# Altium PCB AFE1.PcbDoc
Units mil, origin at the board's own origin, x right, y up, seen from the top; angles counter-clockwise.
Board outline 3484.25 x 2370.08 mil, 2 copper layers (Top Layer, Bottom Layer), stack 49.8 mil thick; 165 components, 125 nets, 450 pads, 83 vias.
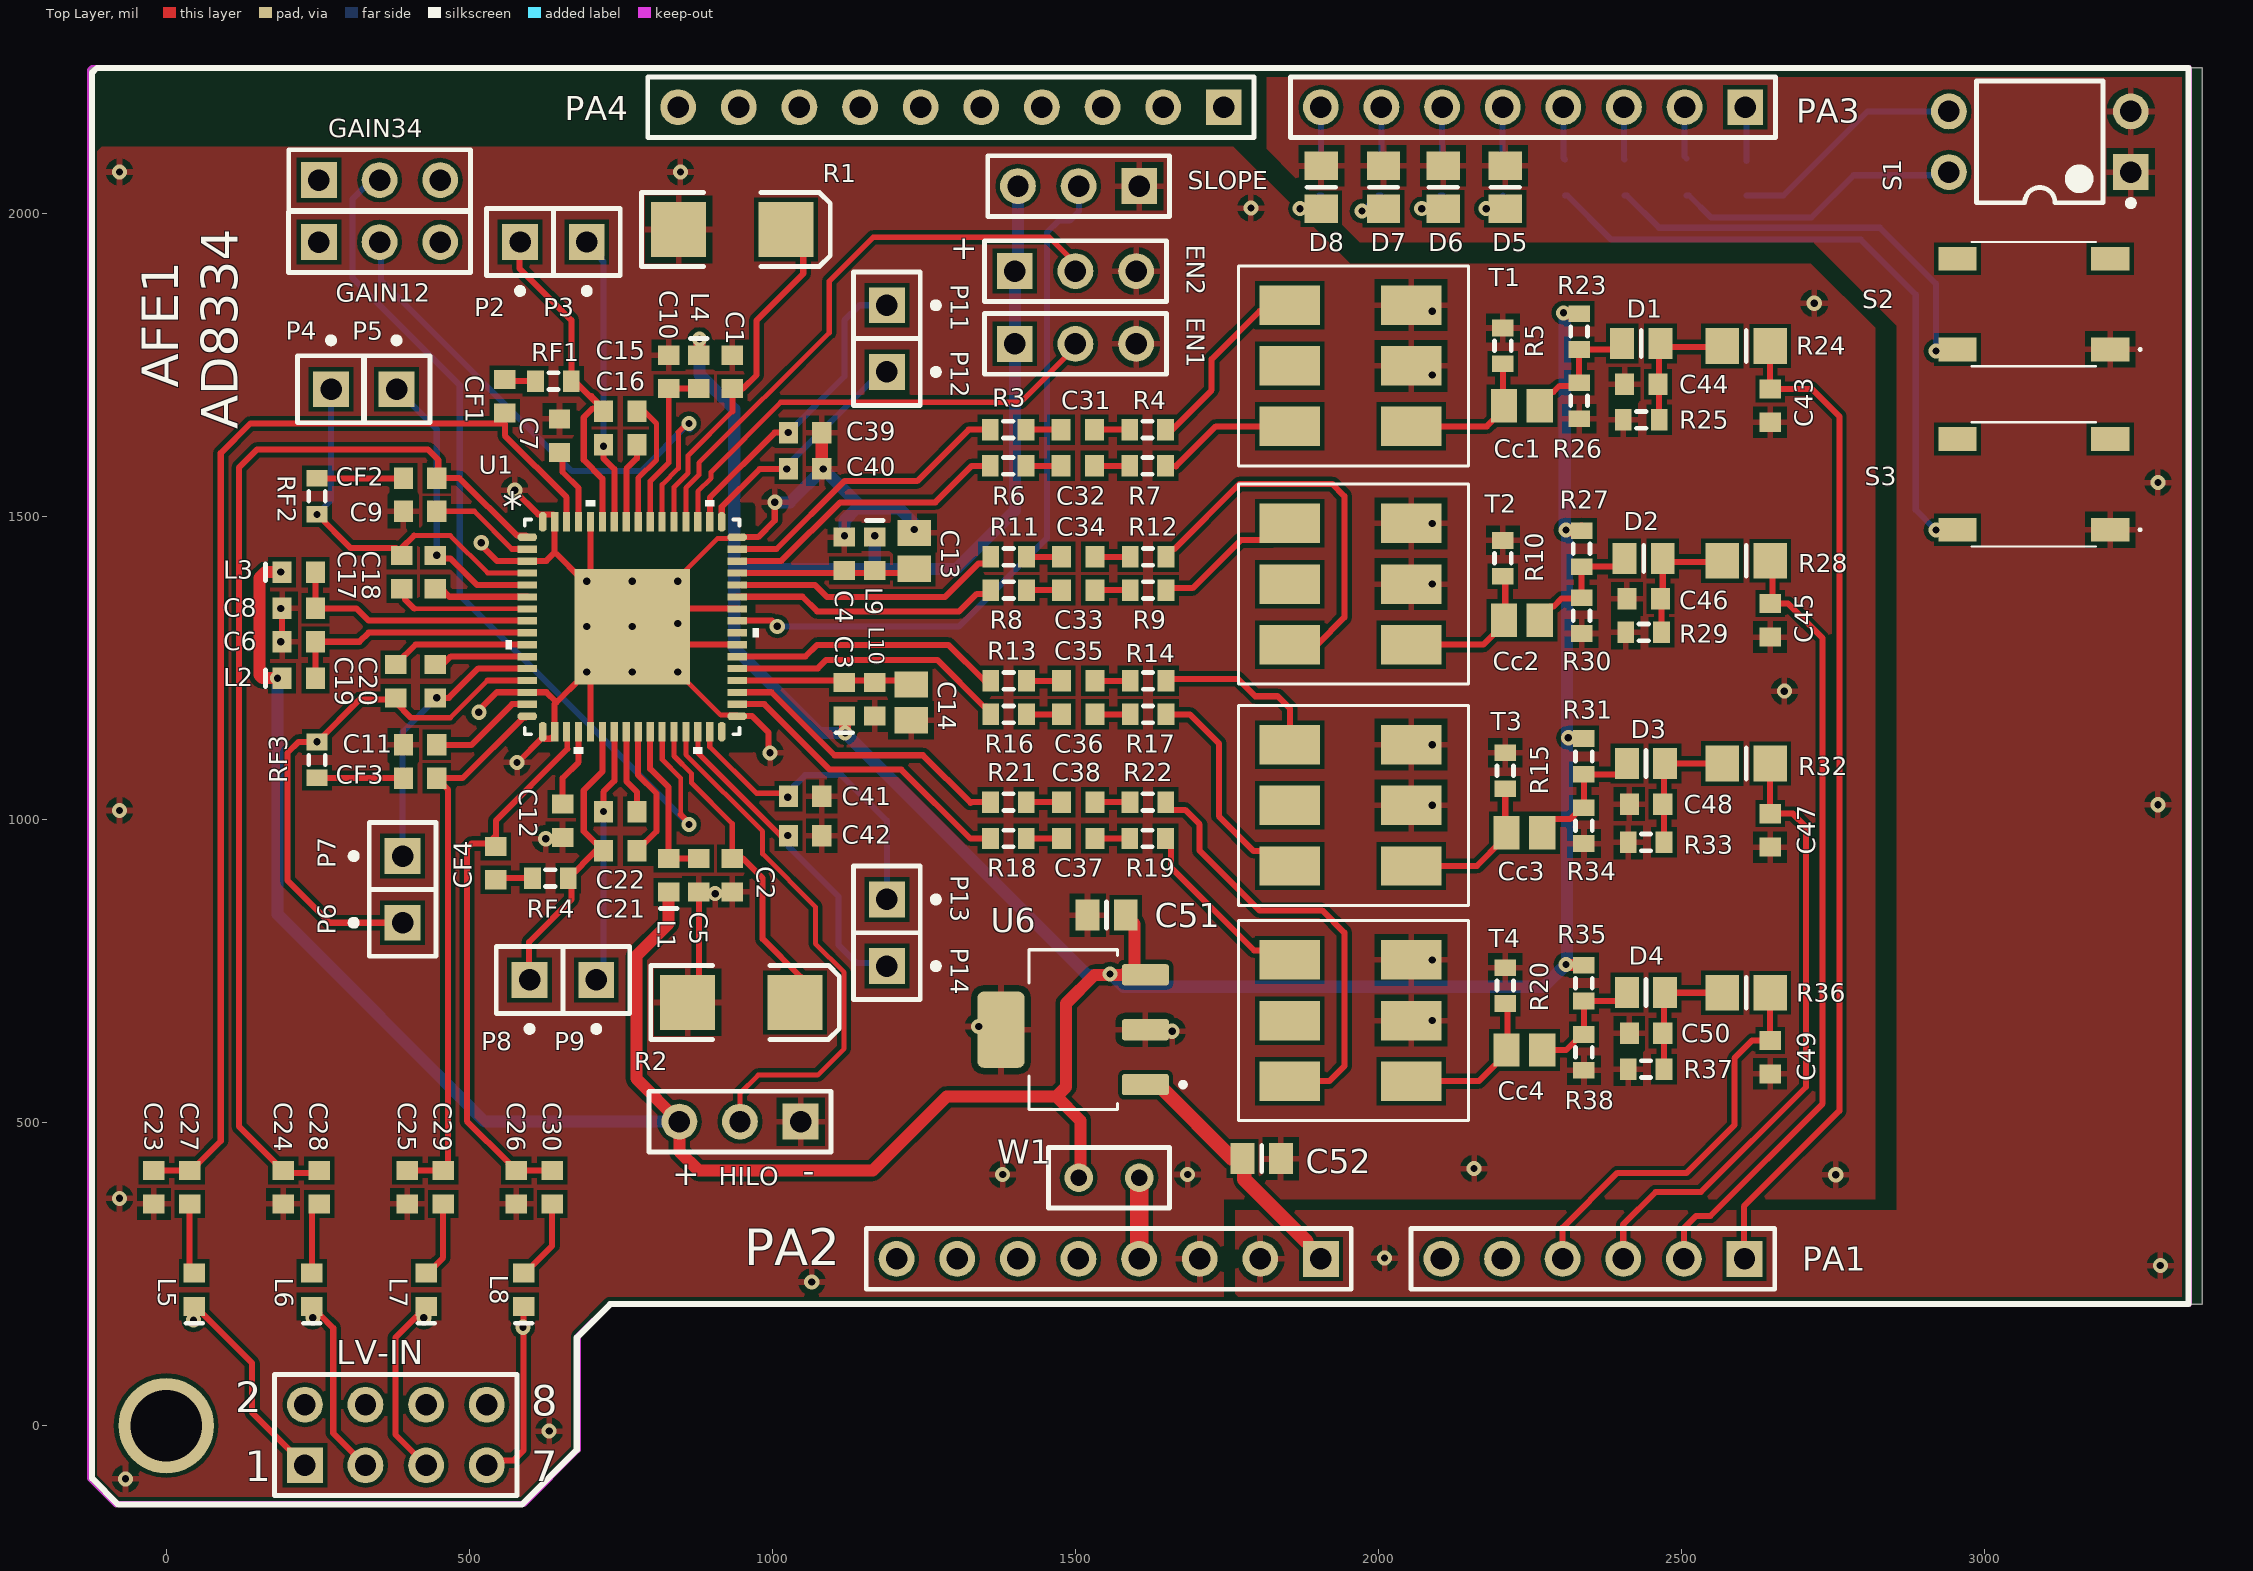
[diagram p0: Top Layer view]
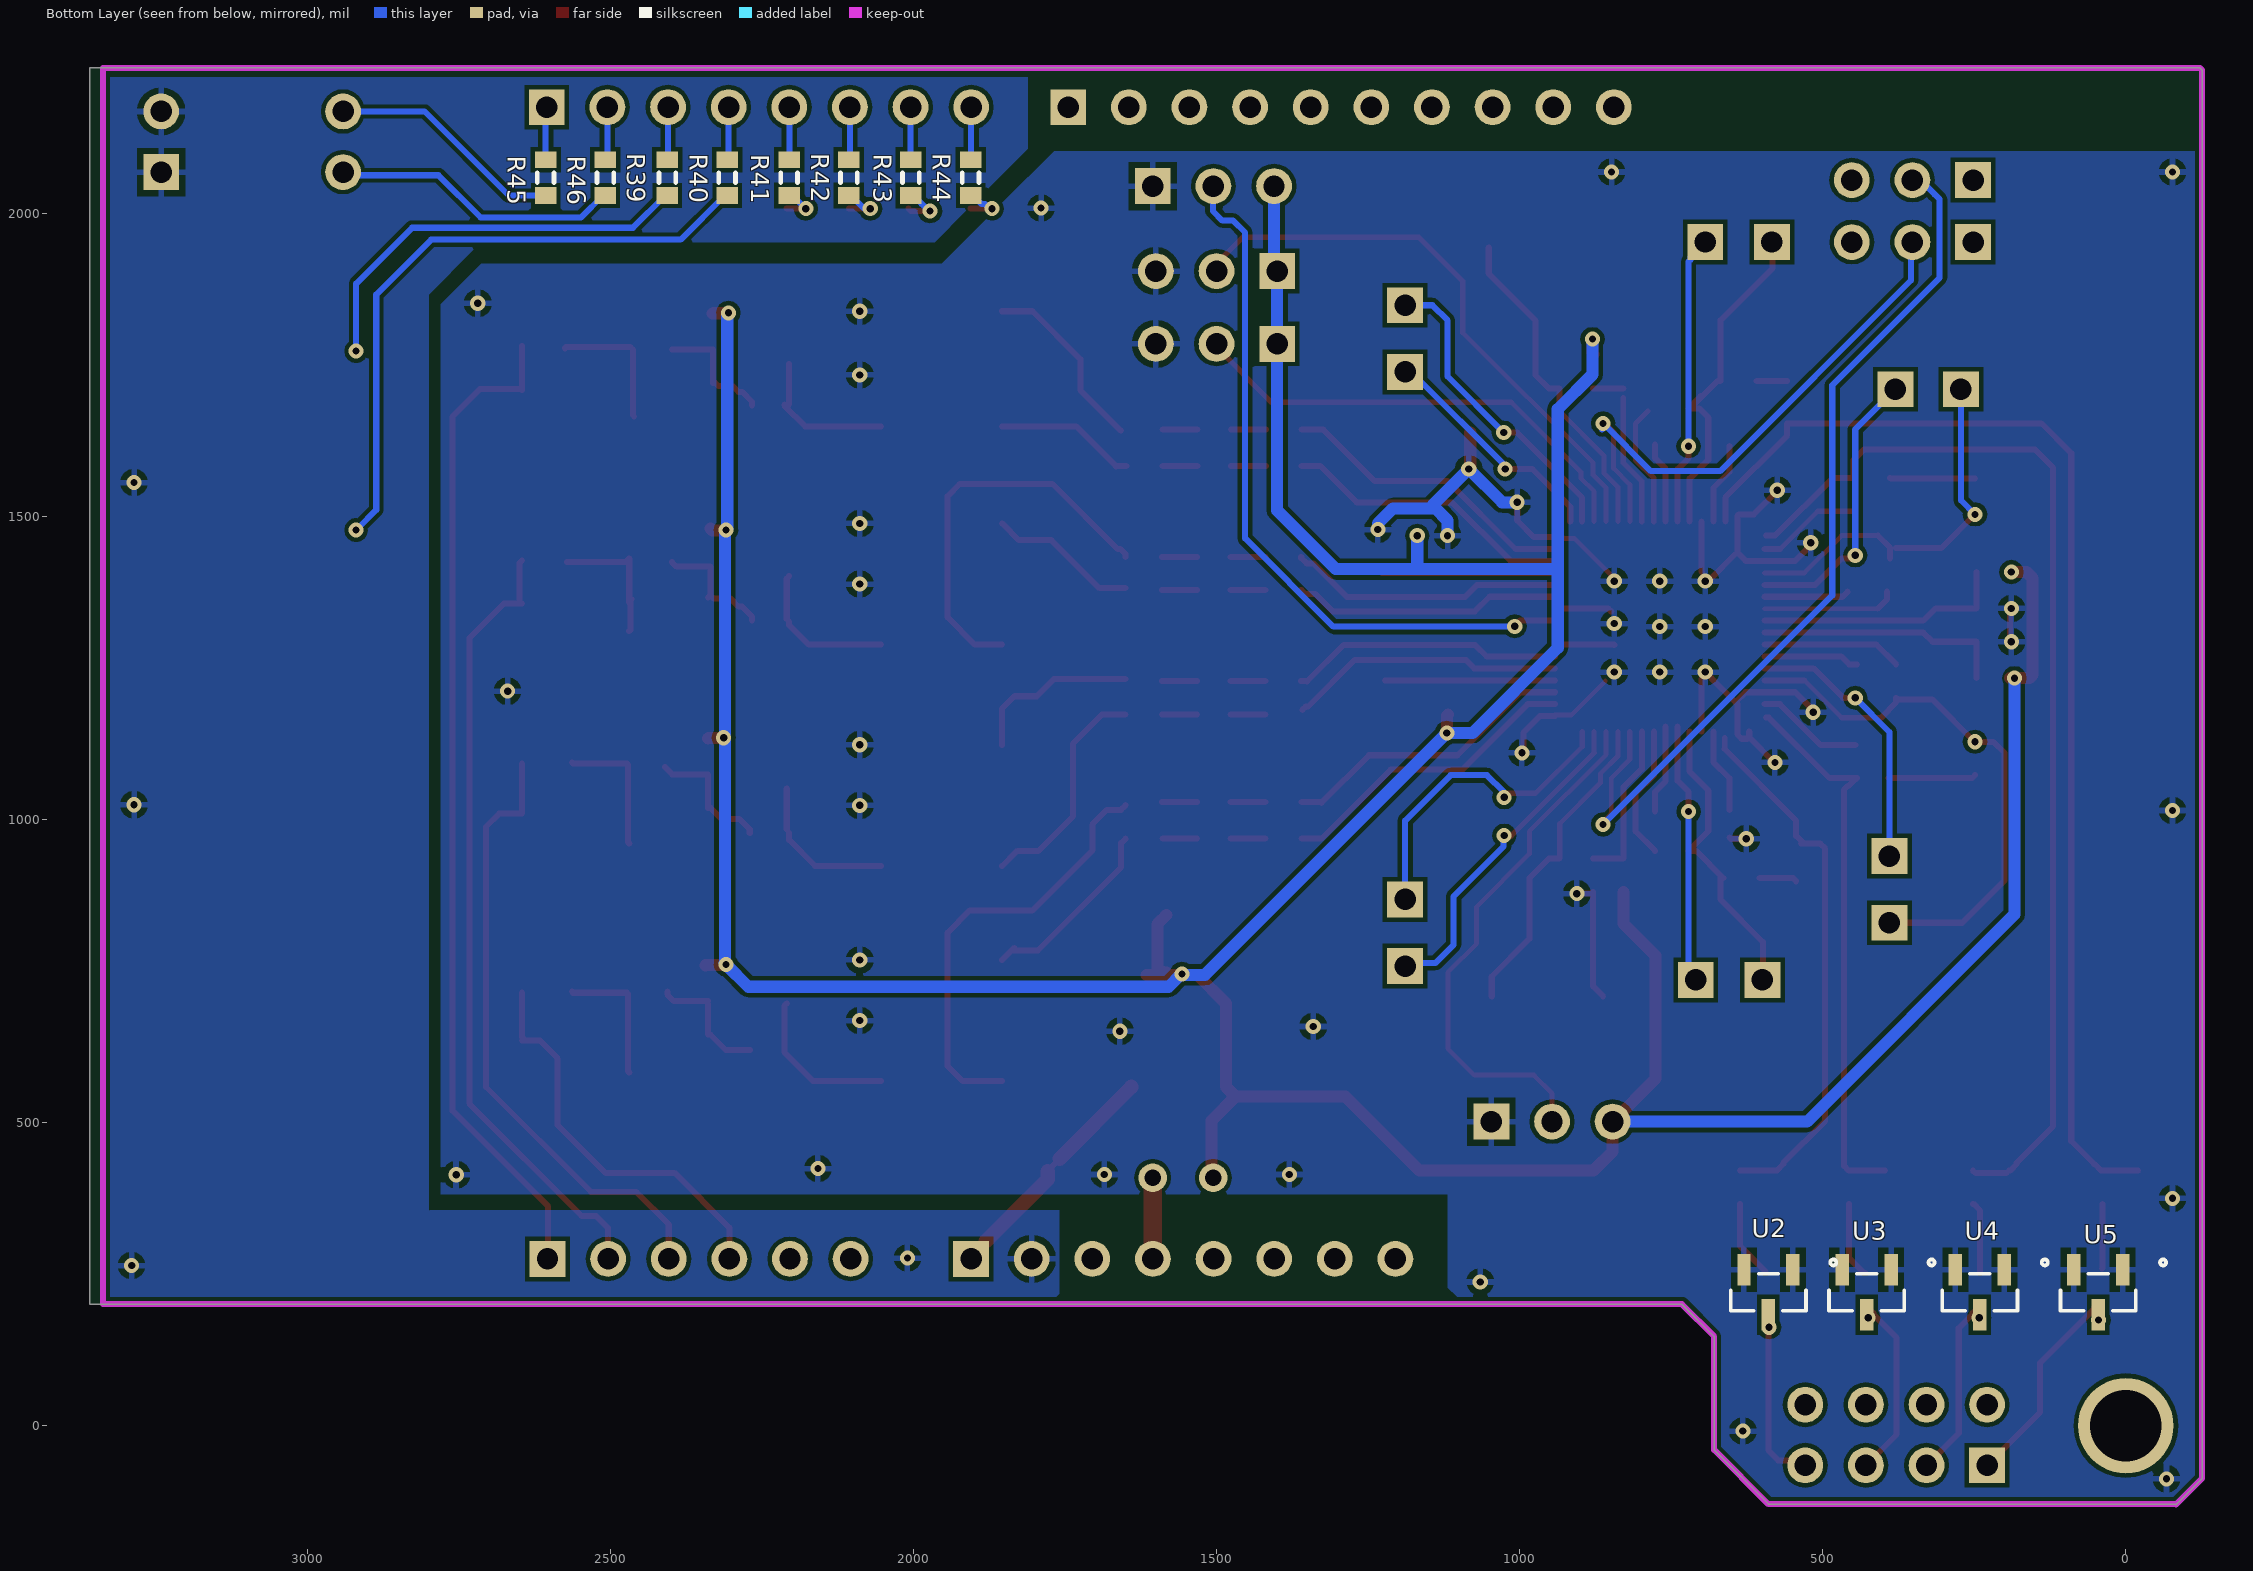
[diagram p1: Bottom Layer view, seen from below]

## Layer stack, top to bottom
Top Solder: solder mask 0.1, Solder Resist, Dk 1
Top Layer: signal copper 1.4
Core: dielectric 47, FR-4, Dk 3.66
Bottom Layer: signal copper 1.4
Bottom Solder: solder mask 0.1, Solder Resist, Dk 1

## Board outline
-125.98,-86.61 -125.98,2000.12 -125.98,2236.22 -122.05,2240.16 3358.27,2240.16 3358.27,200.79 3357.84,200.79 732.28,200.79 679.13,147.64 679.13,-39.37 589.57,-128.94 -83.66,-128.94 -82.68,-129.92

## Design rules (kind name [scope] priority, off if disabled: settings)
Clearance [All] p1: gap=7 ignorepadtopadclearanceinfootprint=FALSE except(0: Arc-Hole Track-Hole SMDPad-Hole THPad-Hole Via-Hole Fill-Hole Poly-Hole Region-Hole Text-Hole)
PlaneClearance [All] p1: clearance=30
PolygonConnect [All] p1: connectstyle=Relief reliefconductorwidth=10 reliefentries=4 polygonreliefangle="90 Angle" airgapwidth=10
RoutingVias [All] p1: holewidth=28 width=50 viastyle="Through Hole" minholewidth=10 minwidth=20 maxholewidth=28 maxwidth=50
SilkToSolderMaskClearance SilkscreenOverComponentPads [IsPad] p1: minsilkscreentomaskgap=10 clearancetoexposedcopper=TRUE
SolderMaskExpansion [All] p1: expansion=4 istentingtop=FALSE
Width [All] p1: maxlimit=50 minlimit=8 preferedwidth=10
28 further rules are at their usual default settings.

## Classes and differential pairs
component class AFE1-2: C31 C32 C33 C34 C35 C36 C37 C38 C43 C44 C45 C46 C47 C48 C49 C50 C51 C52 Cc1 Cc2 Cc3 Cc4 D1 D2 D3 D4 D5 D6 D7 D8 GAIN12 GAIN34 PA1 PA2 PA3 PA4 R3 R4 R5 R6 R7 R8 R9 R10 R11 R12 R13 R14 R15 R16 R17 R18 R19 R20 R21 R22 R23 R24 R25 R26 R27 R28 R29 R30 R31 R32 R33 R34 R35 R36 R37 R38 R39 R40 R41 R42 R43 R44 R45 R46 S1 S2 S3 T1 T2 T3 T4 U6 W1
component class AFE1: C1 C2 C3 C4 C5 C6 C7 C8 C9 C10 C11 C12 C13 C14 C15 C16 C17 C18 C19 C20 C21 C22 C23 C24 C25 C26 C27 C28 C29 C30 C39 C40 C41 C42 CF1 CF2 CF3 CF4 EN1 EN2 HILO L1 L2 L3 L4 L5 L6 L7 L8 L9 L10 LV-IN P2 P3 P4 P5 P6 P7 P8 P9 P11 P12 P13 P14 R1 R2 RF1 RF2 RF3 RF4 SLOPE U2 U3 U4 U5

## Components (designator, comment, footprint, x,y, rotation, side; value= is the part's Value field where it differs from the comment)
C1 "" 1608[0603] 933.74,1738.46 r270 top value=0.1uF
C2 "" 1608[0603] 933.74,908.46 r90 top value=0.1uF
C3 "" 1608[0603] 1168.74,1198.46 r90 top value=0.1uF
C4 "" 1608[0603] 1118.74,1438.46 r270 top value=0.1uF
C5 "" 1608[0603] 878.74,908.46 r90 top value=0.1uF
C6 "" 1608[0603] 218.74,1293.46 r0 top value=0.1uF
C7 "" 1608[0603] 648.74,1633.46 r270 top value=0.1uF
C8 "" 1608[0603] 218.74,1348.46 r0 top value=0.1uF
C9 "" 1608[0603] 418.74,1508.46 r0 top value=0.1uF
C10 "" 1608[0603] 828.74,1738.46 r270 top value=0.1uF
C11 "" 1608[0603] 418.74,1123.46 r0 top value=0.1uF
C12 "" 1608[0603] 653.74,998.46 r90 top value=0.1uF
C13 "" C0805 1233.74,1443.46 r90 top value=1uF
C14 "" C0805 1228.74,1193.46 r270 top value=1uF
C15 "" 1608[0603] 748.74,1673.46 r0 top value=0.1uF
C16 "" 1608[0603] 748.74,1618.46 r0 top value=0.1uF
C17 "" 1608[0603] 388.74,1408.46 r270 top value=0.1uF
C18 "" 1608[0603] 443.74,1408.46 r270 top value=0.1uF
C19 "" 1608[0603] 378.74,1228.46 r90 top value=0.1uF
C20 "" 1608[0603] 443.74,1228.46 r90 top value=0.1uF
C21 "" 1608[0603] 748.74,948.46 r0 top value=0.1uF
C22 "" 1608[0603] 748.74,1013.46 r0 top value=0.1uF
C23 "" 1608[0603] -20.29,393.7 r90 top value=22pF
C24 "" 1608[0603] 192.91,393.7 r90 top value=22pF
C25 "" 1608[0603] 397.64,393.7 r90 top value=22pF
C26 "" 1608[0603] 577.68,393.7 r90 top value=22pF
C27 "" 1608[0603] 38.77,393.7 r90 top value=0.1uF
C28 "" 1608[0603] 252.14,393.7 r90 top value=0.1uF
C29 "" 1608[0603] 456.69,393.7 r90 top value=0.1uF
C30 "" 1608[0603] 636.73,393.7 r90 top value=0.1uF
C31 "" 1608[0603] 1503.74,1643.46 r0 top value=0.1uF
C32 "" 1608[0603] 1503.74,1583.46 r0 top value=0.1uF
C33 "" 1608[0603] 1504.57,1378.62 r0 top value=0.1uF
C34 "" 1608[0603] 1504.57,1433.62 r0 top value=0.1uF
C35 "" 1608[0603] 1504.57,1228.78 r0 top value=0.1uF
C36 "" 1608[0603] 1504.57,1173.78 r0 top value=0.1uF
C37 "" 1608[0603] 1504.21,968.94 r0 top value=0.1uF
C38 "" 1608[0603] 1504.21,1028.94 r0 top value=0.1uF
C39 "" 1608[0603] 1053.74,1638.46 r0 top value=0.1uF
C40 "" 1608[0603] 1053.74,1578.46 r0 top value=0.1uF
C41 "" 1608[0603] 1053.74,1038.46 r0 top value=0.1uF
C42 "" 1608[0603] 1053.74,973.46 r0 top value=0.1uF
C43 "" 1608[0603] 2645.67,1683.07 r270 top value=100pF
C44 "" 1608[0603] 2433.07,1718.5 r180 top value=1nF
C45 "" 1608[0603] 2645.67,1328.74 r270 top value=100pF
C46 "" 1608[0603] 2437.01,1364.17 r180 top value=1nF
C47 "" 1608[0603] 2645.67,982.28 r270 top value=100pF
C48 "" 1608[0603] 2440.94,1025.59 r180 top value=1nF
C49 "" 1608[0603] 2645.67,608.27 r270 top value=100pF
C50 "" 1608[0603] 2440.94,647.64 r180 top value=1nF
C51 "" 6-0805_L 1551.18,842.52 r180 top value=10uF
C52 "" 6-0805_L 1807.09,440.94 r0 top value=10uF
Cc1 "" C0805 2236.22,1683.07 r0 top value=1uF
Cc2 "" C0805 2236.22,1328.74 r0 top value=1uF
Cc3 "" C0805 2240.16,978.35 r0 top value=1uF
Cc4 "" C0805 2240.16,620.08 r0 top value=1uF
CF1 "" 1608[0603] 558.74,1698.46 r270 top value=18nF
CF2 "" 1608[0603] 418.74,1563.46 r0 top value=18nF
CF3 "" 1608[0603] 418.74,1068.46 r0 top value=18nF
CF4 "" 1608[0603] 543.74,928.46 r90 top value=18nF
D1 "Diode" 6-0805_L 2433.07,1785.43 r0 top
D2 "Diode" 6-0805_L 2437.01,1431.1 r0 top
D3 "Diode" 6-0805_L 2440.94,1092.52 r0 top
D4 "Diode" 6-0805_L 2440.94,714.57 r0 top
D5 "" 6-0805_N 2208.66,2043.31 r90 top
D6 "" 6-0805_N 2106.3,2043.31 r90 top
D7 "" 6-0805_N 2007.87,2043.31 r90 top
D8 "" 6-0805_N 1905.51,2043.31 r90 top
EN1 "" HDR1X3 1399.8,1784.84 r0 top
EN2 "" HDR1X3 1399.8,1904.84 r0 top
GAIN12 "" HDR1X3 251.89,1952.76 r0 top
GAIN34 "" HDR1X3 251.97,2054.89 r0 top
HILO "" HDR1X3 1046.46,501.97 r180 top
L1 "" INDC1608L 828.74,908.46 r90 top value=120nH
L2 "" INDC1608L 218.74,1233.46 r0 top value=120nH
L3 "" INDC1608L 218.74,1408.46 r0 top value=120nH
L4 "" INDC1608L 878.74,1738.46 r270 top value=120nH
L5 "" INDC1608L 46.64,224.41 r90 top value=120nH
L6 "" INDC1608L 240.16,224.41 r90 top value=120nH
L7 "" INDC1608L 429.13,224.41 r90 top value=120nH
L8 "" INDC1608L 589.49,224.41 r90 top value=120nH
L9 "" INDC1608L 1168.74,1438.46 r270 top value=120nH
L10 "" INDC1608L 1118.74,1198.46 r90 top value=120nH
LV-IN "Header 4X2" HDR2X4 228.74,-64.96 r0 top locked
P2 "Plug" PIN1 583.66,1952.83 r180 top
P3 "Plug" PIN1 693.66,1952.83 r180 top
P4 "Plug" PIN1 271.88,1710 r0 top
P5 "Plug" PIN1 380,1710 r0 top
P6 "Plug" PIN1 390,830 r90 top
P7 "Plug" PIN1 390,940 r90 top
P8 "Plug" PIN1 599.41,735.59 r180 top
P9 "Plug" PIN1 709.41,735.59 r180 top
P11 "" PIN1 1188.74,1848.46 r270 top
P12 "" PIN1 1188.74,1738.46 r270 top
P13 "" PIN1 1188.74,868.46 r270 top
P14 "" PIN1 1188.74,758.46 r270 top
PA1 "PA1" HDR1X6 2603.35,275.59 r180 top locked
PA2 "Header 8" HDR1X8 1904.72,275.59 r180 top locked
PA3 "Header 8" HDR1X8 2604.53,2175.2 r180 top locked
PA4 "Header 10" HDR1X10 1744.49,2175.2 r180 top locked
R1 "CLMP12" SMB 933.74,1973.46 r0 top value=1K
R2 "CLMP34" SMB 948.74,698.46 r0 top value=1K
R3 "" J1-0603 1388.74,1643.46 r180 top value=100
R4 "" J1-0603 1618.74,1643.46 r180 top value=237
R5 "" J1-0603 2204.72,1781.5 r90 top value=50
R6 "" J1-0603 1388.74,1583.46 r180 top value=100
R7 "" J1-0603 1618.74,1583.46 r180 top value=237
R8 "" J1-0603 1389.57,1378.62 r180 top value=100
R9 "" J1-0603 1619.57,1378.62 r180 top value=237
R10 "" J1-0603 2204.72,1431.1 r90 top value=50
R11 "" J1-0603 1389.57,1433.62 r180 top value=100
R12 "" J1-0603 1619.57,1433.62 r180 top value=237
R13 "" J1-0603 1389.57,1228.78 r180 top value=100
R14 "" J1-0603 1619.57,1228.78 r180 top value=237
R15 "" J1-0603 2208.66,1080.71 r90 top value=50
R16 "" J1-0603 1389.57,1173.78 r180 top value=100
R17 "" J1-0603 1619.57,1173.78 r180 top value=237
R18 "" J1-0603 1389.21,968.94 r180 top value=100
R19 "" J1-0603 1618.74,968.94 r180 top value=237
R20 "" J1-0603 2208.66,726.38 r90 top value=50
R21 "" J1-0603 1389.21,1028.94 r180 top value=100
R22 "" J1-0603 1619.21,1028.94 r180 top value=237
R23 "" J1-0603 2330.71,1805.12 r270 top value=10k
R24 "Res Adj1" RESC2012M 2606.3,1781.5 r0 top value=50K
R25 "" J1-0603 2433.07,1659.45 r180 top value=10k
R26 "" J1-0603 2330.71,1690.94 r90 top value=4.7k
R27 "" J1-0603 2334.65,1446.85 r270 top value=10k
R28 "Res Adj1" RESC2012M 2606.3,1427.17 r0 top value=50K
R29 "" J1-0603 2437.01,1309.06 r180 top value=10k
R30 "" J1-0603 2334.65,1336.61 r90 top value=4.7k
R31 "" J1-0603 2338.58,1104.33 r270 top value=10k
R32 "Res Adj1" RESC2012M 2606.3,1092.52 r0 top value=50K
R33 "" J1-0603 2440.94,962.6 r180 top value=10k
R34 "" J1-0603 2338.58,990.16 r90 top value=4.7k
R35 "" J1-0603 2338.58,730.32 r270 top value=10k
R36 "Res Adj1" RESC2012M 2606.3,714.57 r0 top value=50K
R37 "" J1-0603 2440.94,588.58 r180 top value=10k
R38 "" J1-0603 2338.58,616.14 r90 top value=4.7k
R39 "" J1-0603 2405.51,2059.06 r90 bottom value=560R
R40 "" J1-0603 2307.09,2059.06 r90 bottom value=560R
R41 "" J1-0603 2204.72,2059.06 r90 bottom value=560R
R42 "" J1-0603 2106.3,2059.06 r90 bottom value=560R
R43 "" J1-0603 2003.94,2059.06 r90 bottom value=560R
R44 "" J1-0603 1905.51,2059.06 r90 bottom value=560R
R45 "" J1-0603 2606.3,2059.06 r90 bottom value=560R
R46 "" J1-0603 2507.87,2059.06 r90 bottom value=560R
RF1 "" J1-0603 638.74,1723.46 r0 top value=274
RF2 "" J1-0603 248.74,1533.46 r270 top value=274
RF3 "" J1-0603 248.74,1098.46 r90 top value=274
RF4 "" J1-0603 633.74,903.46 r0 top value=274
S1 "SW DIP-2" DIP-4 3090.55,2118.11 r180 top
S2 "" PTS525SM08SMTR2LFS 3106.3,1850.39 r180 top
S3 "" PTS525SM08SMTR2LFS 3106.3,1552.98 r180 top
SLOPE "" HDR1X3 1605,2045 r180 top
T1 "ADT1-1WT+" ADT1-1WT+ -47651.61,51268.62 r90 top
T2 "ADT1-1WT+" ADT1-1WT+ -47651.61,50908.62 r90 top
T3 "ADT1-1WT+" ADT1-1WT+ -47651.61,50543.62 r90 top
T4 "ADT1-1WT+" ADT1-1WT+ -47651.61,50188.62 r90 top
U1 "AD8334ACPZ" CP_64_1 768.7,1318.14 r0 top value=Value
U2 "BAS40-04-7-F" SOT-23 589.49,220.47 r0 bottom value=Value
U3 "BAS40-04-7-F" SOT-23 427.47,220.47 r0 bottom value=Value
U4 "BAS40-04-7-F" SOT-23 240.76,220.47 r0 bottom value=Value
U5 "BAS40-04-7-F" SOT-23 45.58,220.47 r0 bottom value=Value
U6 "MCP1825S-5002E/DB" SOT230P700X180-4N 1496.06,653.54 r180 top
W1 "Jumper" RAD-0.1 1555.12,409.45 r0 top

## Footprints (in the part's own frame and the unit in brackets; to place one, negate y for a bottom-side part, rotate by r counter-clockwise, add the part's x,y. Pads: shape width x height; smd on the part's side, far side on the other; paste and mask are expansions set on the pad)
6-0805_L [mm] "Chip Resistor, Body 2.0x1.2mm, IPC High Density"
  rect 1x1.3 smd: 1(-0.8,0) 2(0.8,0)
  silkscreen extent 0,-0.55 0,0.55, body extent -1.07,-0.7 1.07,0.7, height 0.7
6-0805_N [mm] "Chip Resistor, Body 2.0x1.2mm, IPC Medium Density"
  rect 1.2x1.4 smd: 1(-0.9,0) 2(0.9,0)
  silkscreen extent 0,-0.6 0,0.6, body extent -1.07,-0.7 1.07,0.7, height 0.7
1608[0603] [mm] "Chip Capacitor, Body 1.6x0.8mm, IPC High Density"
  rect 0.8x0.9 smd: 1(-0.7,0) 2(0.7,0)
  body extent -0.87,-0.48 0.87,0.48, height 1.3
ADT1-1WT+ [mil]
  round 15 on Top Overlay: 1(-49700,-49785)
  rect 65x100 smd: 1(-49620,-49705) 2(-49520,-49705) 3(-49420,-49705) 4(-49420,-49505) 5(-49520,-49505) 6(-49620,-49505)
  silkscreen extent -49685,-49800 -49355,-49420
C0805 [mm] "Chip Capacitor, Body 2.0x1.3mm, IPC High Density"
  rect 1.1x1.4 smd: 1(-0.75,0) 2(0.75,0)
  body extent -1.1,-0.72 1.1,0.72, height 1.4
CP_64_1 [mil]
  oct 32x12 smd mask+5: 1(-173,147.64) 16(-173,-147.64) 33(173,-147.64) 48(173,147.64)
  rect 32x12 smd mask+5: 2(-173,127.95) 3(-173,108.27) 4(-173,88.58) 5(-173,68.9) 6(-173,49.21) 7(-173,29.53) 8(-173,9.84) 9(-173,-9.84) 10(-173,-29.53) 11(-173,-49.21) 12(-173,-68.9) 13(-173,-88.58) 14(-173,-108.27) 15(-173,-127.95) 34(173,-127.95) 35(173,-108.27) 36(173,-88.58) 37(173,-68.9) 38(173,-49.21) 39(173,-29.53) 40(173,-9.84) 41(173,9.84) 42(173,29.53) 43(173,49.21) 44(173,68.9) 45(173,88.58) 46(173,108.27) 47(173,127.95)
  oct 12x32 smd mask+5: 17(-147.64,-173) 32(147.64,-173) 49(147.64,173) 64(-147.64,173)
  rect 12x32 smd mask+5: 18(-127.95,-173) 19(-108.27,-173) 20(-88.58,-173) 21(-68.9,-173) 22(-49.21,-173) 23(-29.53,-173) 24(-9.84,-173) 25(9.84,-173) 26(29.53,-173) 27(49.21,-173) 28(68.9,-173) 29(88.58,-173) 30(108.27,-173) 31(127.95,-173) 50(127.95,173) 51(108.27,173) 52(88.58,173) 53(68.9,173) 54(49.21,173) 55(29.53,173) 56(9.84,173) 57(-9.84,173) 58(-29.53,173) 59(-49.21,173) 60(-68.9,173) 61(-88.58,173) 62(-108.27,173) 63(-127.95,173)
  rect 191x191 smd mask+4: 65(0,0)
  silkscreen extent -209,-209 209,209
DIP-4 [mm] "DIP; 4 Leads; Row Spacing 7.62 mm; Pitch 2.54 mm"
  rect 1.5x1.5 hole 0.9: 1(-3.81,1.27)
  round 1.5 hole 0.9: 2(-3.81,-1.27) 3(3.81,-1.27) 4(3.81,1.27)
  silkscreen extent -3.94,-2.55 2.65,2.69, body extent -3.15,-2.5 3.15,2.5, height 5.6
HDR1X3 [mm] "Connector; Header; 3 Position"
  rect 1.5x1.5 hole 0.9: 1(0,0)
  round 1.5 hole 0.9: 2(2.54,0) 3(5.08,0)
  silkscreen extent -1.27,-1.27 6.35,1.27
HDR1X6 [mm] "Connector; Header; 6 Position"
  rect 1.5x1.5 hole 0.9: 1(0,0)
  round 1.5 hole 0.9: 2(2.54,0) 3(5.08,0) 4(7.62,0) 5(10.16,0) 6(12.7,0)
  silkscreen extent -1.27,-1.27 13.97,1.27
HDR1X8 [mm] "Connector; Header; 8 Position"
  rect 1.5x1.5 hole 0.9: 1(0,0)
  round 1.5 hole 0.9: 2(2.54,0) 3(5.08,0) 4(7.62,0) 5(10.16,0) 6(12.7,0) 7(15.24,0) 8(17.78,0)
  silkscreen extent -1.27,-1.27 19.05,1.27
HDR1X10 [mm] "Connector; Header; 10 Position"
  rect 1.5x1.5 hole 0.9: 1(0,0)
  round 1.5 hole 0.9: 2(2.54,0) 3(5.08,0) 4(7.62,0) 5(10.16,0) 6(12.7,0) 7(15.24,0) 8(17.78,0) 9(20.32,0) 10(22.86,0)
  silkscreen extent -1.27,-1.27 24.13,1.27
HDR2X4 [mm] "Connector; Header; 4x2 Position"
  rect 1.5x1.5 hole 0.9: 1(0,0)
  round 1.5 hole 0.9: 2(0,2.54) 3(2.54,0) 4(2.54,2.54) 5(5.08,0) 6(5.08,2.54) 7(7.62,0) 8(7.62,2.54)
  silkscreen extent -1.27,-1.27 8.89,3.81
INDC1608L [mm] "Chip Inductor, Body 1.6x0.8mm, IPC High Density"
  rect 0.8x0.9 smd: 1(-0.7,0) 2(0.7,0)
  silkscreen extent -1.4,-0.35 -1.4,0.35, body extent -0.87,-0.48 0.87,0.48, height 0.55
J1-0603 [mm] "Chip Resistor, Body 1.6x0.8mm, IPC High Density"
  rect 0.7x0.9 smd: 1(-0.75,0) 2(0.75,0)
  silkscreen extent -0.2,-0.35 0.2,0.35, body extent -0.85,-0.48 0.85,0.48, height 0.9
PIN1 [mm] "Connector; Plug"
  rect 1.5x1.5 hole 0.9: 1(0,0)
  silkscreen extent -1.4,-1.4 1.4,2.17
PTS525SM08SMTR2LFS [mm]
  rect 1.6x1 smd: 1(-2.55,1.9) 2(3.85,1.9) 3(-2.55,-1.9) 4(3.85,-1.9)
  silkscreen extent -3.85,-2.6 3.25,2.6
RAD-0.1 [mm] "Radial Cap, Thru-Hole; 2 Leads; 0.1 in Pin Spacing"
  round 1.2 hole 0.7: 1(-1.27,0) 2(1.27,0)
  silkscreen extent -2.54,-1.27 2.54,1.27
RESC2012M [mm] "Chip Resistor, Body 2.0x1.3mm, IPC Low Density"
  rect 1.4x1.5 smd: 1(-1,0) 2(1,0)
  silkscreen extent 0,-0.65 0,0.65, body extent -1.07,-0.7 1.07,0.7, height 0.65
SMB [mm] "DO-214-AA/SMB; 2 C-Bend Leads; Body 5.3 x 3.6 mm, inc. leads (LxW)"
  rect 2.3x2.3 smd: 1(-2.25,0) 2(2.25,0)
  silkscreen extent -3.8,-1.55 4.1,1.55
SOT230P700X180-4N [mm]
  rrect25% 1.97x0.89 smd: 1(-3.025,2.3) 2(-3.025,0) 3(-3.025,-2.3)
  rrect25% 1.97x3.19 smd: 4(3.025,0)
  silkscreen extent -4.7,-3.35 1.85,3.35, body extent -3.5,-3.25 3.5,3.25, height 1.8
SOT-23 [mm]
  rect 0.561x1.321 smd paste+0 mask+0: 1(-1.025,-0.945) 2(1.025,-0.945) 3(0,0.945)
  silkscreen extent -2.85,-1.38 1.58,0.78, body extent 0,0 0.25,0.25, height 0.25

## Part data
C1 C2 C3 C4 C5 C6 C7 C8 C9 C10 C11 C12 C15 C16 C17 C18 C19 C20 C21 C22 C23 C24 C25 C26 C27 C28 C29 C30 C31 C32 C33 C34 C35 C36 C37 C38 C39 C40 C41 C42 C43 C44 C45 C46 C47 C48 C49 C50 C51 C52 CF1 CF2 CF3 CF4: library part "Cap Semi", "Capacitor (Semiconductor SIM Model)", LatestRevisionDate=29-May-2009, LatestRevisionNote="IPC-7351 Footprint Added.", PackageDescription="Chip Capacitor", PackageReference=C1206, Published=8-Jun-2000, Publisher="Altium Limited"
C13 C14 Cc1 Cc2 Cc3 Cc4: library part "Cap Pol3", "Polarized Capacitor (Surface Mount)", LatestRevisionDate=29-May-2009, LatestRevisionNote="IPC-7351 Footprint Added.", PackageDescription="Chip Capacitor", PackageReference=C0805, Published=8-Jun-2000, Publisher="Altium Limited"
D1 D2 D3 D4: "Default Diode", Code_JEDEC=DO-214-AB, LatestRevisionDate=17-Jul-2002, LatestRevisionNote="Re-released for DXP Platform.", PackageDescription="DO-214-AB/SMC; 2 C-Bend Leads; Body 7.9 x 5.9 mm, inc. leads (LxW)", PackageReference=SMC, PackageVersion=Sep-1996, Published=8-Jun-2000, Publisher="Altium Limited"
D5 D6 D7 D8: library part LED3, "Typical BLUE SiC LED", DatasheetVersion=16-Apr-2002, LatestRevisionDate=17-Dec-2003, LatestRevisionNote="PCB Footprint replaced.", PackageDescription="SM LED; 2 C-Bend Leads; Body 3.5 x 2.8 x 1.9 mm, inc leads (LxWxH typ)", PackageReference=3.5X2.8X1.9, PackageVersion=16-Apr-2002, Published=8-Jun-2000, Publisher="Altium Limited"
EN1 EN2 GAIN12 GAIN34 HILO SLOPE: library part "Header 3", "Header, 3-Pin", LatestRevisionDate=17-Jul-2002, LatestRevisionNote="Re-released for DXP Platform.", Publisher="Altium Limited"
L1 L2 L3 L4 L5 L6 L7 L8 L9 L10: library part Inductor, "Inductor", Code_IEC=1005, Code_JEITA=0402, LatestRevisionDate=29-May-2009, LatestRevisionNote="IPC-7351 Footprint Added.", PackageDescription="Chip Inductor", PackageReference=0402-A, Published=8-Jun-2000, Publisher="Altium Limited"
LV-IN: "Header, 4-Pin, Dual row", LatestRevisionDate=17-Jul-2002, LatestRevisionNote="Re-released for DXP Platform.", Publisher="Altium Limited"
P11 P12 P13 P14: library part Plug, "Plug", LatestRevisionDate=17-Jul-2002, LatestRevisionNote="Re-released for DXP Platform.", Publisher="Altium Limited"
PA1: library part "Header 6", "Header, 6-Pin", LatestRevisionDate=17-Jul-2002, LatestRevisionNote="Re-released for DXP Platform.", Publisher="Altium Limited"
PA2 PA3: "Header, 8-Pin", LatestRevisionDate=17-Jul-2002, LatestRevisionNote="Re-released for DXP Platform.", Publisher="Altium Limited"
PA4: "Header, 10-Pin", LatestRevisionDate=17-Jul-2002, LatestRevisionNote="Re-released for DXP Platform.", Publisher="Altium Limited"
R1 R2: library part "Res Adj1", "Variable Resistor", LatestRevisionDate=17-Jul-2002, LatestRevisionNote="Re-released for DXP Platform.", PackageDescription="Axial Device, Thru-Hole; 2 Leads; 0.7 in Pin Spacing", PackageReference=AXIAL-0.7, Published=8-Jun-2000, Publisher="Altium Limited", Set Position=0.5
R3 R4 R5 R6 R7 R8 R9 R10 R11 R12 R13 R14 R15 R16 R17 R18 R19 R20 R21 R22 R23 R25 R26 R27 R29 R30 R31 R33 R34 R35 R37 R38 R39 R40 R41 R42 R43 R44 R45 R46 RF1 RF2 RF3 RF4: library part Res3, "Resistor", LatestRevisionDate=29-May-2009, LatestRevisionNote="IPC-7351 Footprint Added.", PackageDescription="Chip Resistor", PackageReference=J1-0603, Published=8-Jun-2000, Publisher="Altium Limited"
R24 R28 R32 R36: "Variable Resistor", LatestRevisionDate=17-Jul-2002, LatestRevisionNote="Re-released for DXP Platform.", PackageDescription="Axial Device, Thru-Hole; 2 Leads; 0.7 in Pin Spacing", PackageReference=AXIAL-0.7, Published=8-Jun-2000, Publisher="Altium Limited", Set Position=0.5
S1: "DIP Switch, 2 Position, SPST", LatestRevisionDate=17-Jul-2002, LatestRevisionNote="Re-released for DXP Platform.", PackageReference=DIP-4, Published=24-Mar-1999, Publisher="Altium Limited"
S2 S3: library part SW-PB, "Switch", LatestRevisionDate=17-Jul-2002, LatestRevisionNote="Re-released for DXP Platform.", PackageDescription="Switch; 2 Leads", PackageReference=SPST-2, Published=24-Mar-1999, Publisher="Altium Limited"
U1 U2 U3 U4 U5: "Imported", RefDes=RefDes
  U1: Type=DEV
  U2 U3 U4 U5: Built_By=EMA_UL_Team, Manufacturer_Part_Number=BAS40-04-7-F, Type=Type, Vendor="Diodes Inc"
U6: Package=None, Availability=Unavailable, MF="{'manufacturer': u'Microchip'}", MP=MCP1825S-5002E/DB, Price=None
W1: "Jumper Wire", LatestRevisionDate=17-Jul-2002, LatestRevisionNote="Re-released for DXP Platform.", PackageDescription="Radial Cap, Thru-Hole; 2 Leads; 0.2 in Pin Spacing", PackageReference=RAD-0.2, Published=24-Mar-1999, Publisher="Altium Limited"
P2 P3 P4 P5 P6 P7 P8 P9: LatestRevisionDate=17-Jul-2002, LatestRevisionNote="Re-released for DXP Platform.", Publisher="Altium Limited"

## Free pads (board coordinates)
  round 157.48 hole 118.11: 0(0,0.39)

## Via types
v1: diameter 25, hole 12, Top Layer to Bottom Layer, tented both sides, 45 vias
v2: diameter 25, hole 12, Top Layer to Bottom Layer, 38 vias

## Nets (pads, with @x,y where several pads share a name; then routed paths per layer and width w, separated by ;. In a path a pad name is that pad's centre, name@x,y a point inside that pad or via, vN(x,y) a via of type N, cw(c..) or ccw(c..) an arc to the next point about the centre after c; other vN are vias at no path point)
+5V: C51.1 EN1.1 EN2.1 HILO.3 L1.1 L2.1 L3.1 L4.1 L9.1 L10.1 R23.1 R27.1 R31.1 R35.1 SLOPE.3 U6.3 W1.1 | length 7645.8
  Top Layer w20: L2.1 158.74,1233.46 153.74,1238.46 153.74,1398.46 163.74,1408.46 L3.1 ; L1.1 828.74,828.74 775.59,775.59 775.59,572.83 HILO.3 846.46,452.76 877.95,421.26 1165.35,421.26 1287.4,543.31 1468.5,543.31 ; L4.1@877.95,1767.72 879.72,1769.49 v1(879.72,1792.68) ; L10.1@1118.11,1173.23 1119.88,1171.46 v1(1119.88,1143.07) ; W1.1@1507.87,409.45 1507.87,503.94 1468.5,543.31 ; U6.3@1582.68,744.09 1556.89,744.09 1531.5,744.09 1484.25,696.85 1484.25,559.06 1468.5,543.31 ; U6.3@1582.68,748.03 1588.78,748.03 1597.36,756.61 1597.36,827.83 C51.1 ; U6.3@1588.78,744.09 U6.3 ; v1(2304.92,1835.98) 2305.59,1835.32 2330.04,1835.32 R23.1 ; v1(2308.86,761.18) 2309.53,760.51 2341.85,760.51 R35.1@2342.52,759.84 ; v1(2308.86,1477.72) 2309.53,1477.05 2331.38,1477.05 R27.1@2334.65,1480.31 ; v1@2311.02,1133.86 2311.69,1134.53 v1@2313.46,1134.53 ; v1(2312.8,1135.2) v1@2313.46,1134.53 ; R31.1 2337.91,1134.53 v1@2313.46,1134.53
  Bottom Layer w20: v2(183.74,1233.46) 183.74,843.82 525.59,501.97 844.49,501.97 HILO.3@846.46,503.94 ; v1(879.72,1792.68) 879.72,1734.45 937.01,1677.17 937.01,1413.39 ; v2(1168.74,1468.46) 1168.74,1420.71 1161.42,1413.39 ; EN2.1@1397.64,1909.45 1405,1916.81 SLOPE.3 ; EN1.1 1399.8,1510.04 1303.15,1413.39 1161.42,1413.39 ; EN1.1@1399.8,1785.63 EN2.1 ; 1518.86,744.09 v1(1119.88,1143.07) 1077.4,1143.07 937.01,1283.46 937.01,1413.39 ; 1519.68,744.09 v1@1555.12,744.09 ; v1@1559.06,744.09 1578.74,724.41 2272.09,724.41 v1(2308.86,761.18) ; v1(2304.92,1835.98) 2306.89,1834.02 2306.89,1480.51 v1@2307.09,1480.31 ; v1(2308.86,1477.72) 2310.83,1475.75 v1@2310.83,1141.54 ; v1@2311.02,763.78 2310.83,763.98 2310.83,1133.23 v1(2312.8,1135.2) ; 937.01,1413.39 1161.42,1413.39
  other v1: 1556.89,745.43
  other v2: 188.74,1408.46
AGND: C1.1 C2.1 C3.1 C4.1 C5.1 C6.1 C7.1 C8.1 C9.1 C10.1 C11.1 C12.1 C13.2 C14.2 C23.1 C24.1 C25.1 C26.1 C39.2 C40.2 C41.2 C42.2 C43.2 C44.2 C45.2 C46.2 C47.2 C48.2 C49.2 C50.2 C51.2 C52.2 EN1.3 EN2.3 HILO.1 PA2.3 R1.1 R2.1 R5.2 R10.2 R15.2 R20.2 R25.2 R26.1 R29.2 R30.1 R33.2 R34.1 R37.2 R38.1 SLOPE.1 T1.2 T1.3 T2.2 T2.3 T3.2 T3.3 T4.2 T4.3 U1.3 U1.14 U1.17 U1.18 U1.21 U1.33 U1.39 U1.42 U1.48 U1.60 U1.63 U1.64 U1.65 U2.1 U2.2 U3.1 U3.2 U4.1 U4.2 U5.1 U5.2 U6.2 U6.4 | length 2216.8
  Top Layer w8: U1.65@843.74,1398.46 908.86,1463.58 926.16,1463.58 927.01,1464.44 940.36,1464.44 U1.48 ; U1.65@858.74,1228.46 914.74,1172.46 U1.33@941.74,1172.46
  Top Layer w10: C6.1 C8.1 ; v1@518.74,1173.46 518.74,1183.46 545.47,1210.2 595.74,1210.2 627.01,1210.2 643.74,1193.46 ; v1@523.74,1463.46 523.74,1448.46 545.47,1426.73 595.74,1426.73 627.01,1426.73 641.24,1440.96 640.79,1441.42 640.79,1491.46 640.79,1501.42 638.74,1503.46 613.74,1503.46 v1@573.74,1543.46 ; v1@578.74,1093.46 621.1,1135.83 U1.17@621.1,1145.46 ; U1.17@623.74,1133.46 633.74,1133.46 640.79,1140.51 640.79,1145.46 640.79,1190.51 643.74,1193.46 ; v1(625.98,968.5) 651.34,968.5 C12.1 ; 643.74,1438.46 683.74,1398.46 U1.65@688.74,1398.46 ; U1.65@683.74,1233.46 643.74,1193.46 ; U1.65@698.74,1233.46 699.84,1232.36 U1.21@699.84,1145.46 ; U1.65@698.74,1408.46 699.84,1409.57 U1.60@699.84,1491.46 ; U1.65@843.74,1288.46 844.21,1288.94 U1.39@941.74,1288.94 ; U1.65@848.74,1343.46 853.27,1347.99 U1.42@941.74,1347.99 ; R2.1@862.2,708.66 878.74,725.2 C5.1 881.69,877.95 v1@901.57,877.95 ; U1.33@941.74,1170.83 966.38,1170.83 993.74,1143.46 v1@993.74,1108.46 ; U1.48@941.74,1464.46 941.74,1466.1 976.38,1466.1 1003.74,1493.46 v1@1003.74,1523.46 ; C40.2 1081.3,1575.91 C40.2@1083.74,1573.46
  Top Layer w20: C40.2 C39.2
  Bottom Layer w10: v2(1233.74,1478.46) v2@1233.74,1488.46
  Bottom Layer w20: v1@1003.74,1523.46 1028.74,1523.46 v2(1083.74,1578.46) 1143.74,1518.46 ; v2(1118.74,1468.46) 1118.74,1493.46 1138.74,1513.46 1208.74,1513.46 v2@1233.74,1488.46
  other v1: -67.13,-87.24 631.69,-8.5 1064.76,237.56 -76.97,375.35 1379.72,414.72 1684.84,414.72 2157.28,424.57 1659.25,650.95 1340.35,658.82 905.51,877.95 -76.97,1015.12 578.74,1094.49 996.06,1110.24 515.75,1177.17 2669.09,1211.97 519.68,1456.69 1003.94,1523.62 574.8,1543.31 2718.31,1851.73 -76.97,2068.27 848.23,2068.27
  other v2: 2753.74,414.29 2088.39,668.62 2088.39,768.62 2088.39,1023.62 2088.39,1123.62 693.74,1243.46 768.74,1243.46 843.74,1243.46 188.74,1293.46 693.74,1318.46 768.74,1318.46 843.74,1323.46 188.74,1348.46 2088.39,1388.62 693.74,1393.46 768.74,1393.46 843.74,1393.46 2088.39,1488.62 2088.39,1733.62 2088.39,1838.62 1789.17,2008.78
CLMP12: C1.2 R1.2 U1.53 | length 550.5
  Top Layer w8: U1.53@837.64,1491.46 837.64,1548.58 860.74,1571.68 860.74,1600.46 933.74,1673.46
  Top Layer w10: 933.74,1673.46 C1.2 951.18,1710.91 973.74,1733.46 973.74,1823.46 1050.83,1900.55 R1.2@1050.83,1943.46
CLMP34: C2.2 R2.2 U1.28 | length 533.5
  Top Layer w8: U1.28@837.64,1145.46 837.64,1105.02 866.74,1075.92 866.74,1060.46 933.74,993.46
  Top Layer w9: C2.2 933.74,993.46
  Top Layer w10: C2.2 951.18,936.02 983.74,903.46 983.74,803.46 1045.83,741.38 R2.2@1045.83,708.46
DAC-A: GAIN12.3
DAC-B: GAIN34.3
EN12: EN2.2 U1.52 | length 960.2
  Top Layer w8: U1.52@857.32,1491.46 857.32,1547.05 878.74,1568.46 878.74,1588.46 1093.74,1803.46
  Top Layer w9: 1093.74,1803.46 1093.74,1888.46 1165.91,1960.63 1456.69,1960.63 EN2.2@1507.87,1909.45
EN34: EN1.2 U1.51 | length 808
  Top Layer w8: U1.51@877.01,1491.46 877.01,1541.73 898.74,1563.46 898.74,1573.46 1013.74,1688.46
  Top Layer w9: 1013.74,1688.46 1408.74,1688.46 1503.74,1783.46 EN1.2@1503.74,1808.46
ENV_O1: C43.1 PA1.1 R24.2 | length 1664.7
  Top Layer w10: PA1.1@2602.36,271.65 2602.36,362.2 2759.84,519.68 2759.84,1665.35 2714.57,1710.63 C43.1 ; C43.1@2645.67,1708.66 R24.2
ENV_O2: C45.1 PA1.2 R28.2 | length 1315
  Top Layer w10: PA1.2 2503.35,326.18 2523.62,346.46 2547.24,346.46 2732.28,531.5 2732.28,1299.21 2675.2,1356.3 C45.1@2649.61,1356.3 ; C45.1 C45.1@2649.61,1356.3 ; R28.2 2649.61,1423.23 C45.1@2649.61,1356.3
ENV_O3: C47.1 PA1.3 R32.2 | length 1030.7
  Top Layer w10: PA1.3@2401.57,275.59 2403.35,277.36 2403.35,332.48 2456.69,385.83 2531.5,385.83 2704.72,559.06 2704.72,988.19 2683.07,1009.84 C47.1 ; C47.1@2645.67,1011.81 R32.2
ENV_O4: C49.1 PA1.4 R36.2 | length 664.6
  Top Layer w10: PA1.4 2303.35,326.97 2393.7,417.32 2507.87,417.32 2586.61,496.06 2586.61,606.3 2616.14,635.83 C49.1 ; C49.1@2641.73,637.8 2645.67,641.73 R36.2
GAIN12: GAIN12.2 U1.54 | length 936.5
  Top Layer w8: U1.54@817.95,1491.46 817.95,1552.68 844.74,1579.46 844.74,1639.46
  Top Layer w9: 844.74,1639.46 v1@863.74,1658.46
  Bottom Layer w10: GAIN12.2@350.39,1952.76 354.33,1948.82 354.33,1889.76 669.29,1574.8 783.46,1574.8 v1(862.2,1653.54) ; v1@863.74,1643.46 v1@863.74,1658.46
GAIN34: GAIN34.2 U1.27 | length 1493.9
  Top Layer w8: 817.95,1099.25 848.74,1068.46 848.74,1008.46
  Top Layer w9: 817.95,1099.25 U1.27@817.95,1145.46
  Top Layer w10: 848.74,1008.46 v1@866.24,990.96
  Bottom Layer w10: GAIN34.2@350.39,2059.06 342.86,2059.06 315.17,2031.36 314.83,2031.36 307.09,2023.62 307.09,1893.7 484.25,1716.54 484.25,1370.08 v1(862.2,992.13)
GND: D5.2 D6.2 D7.2 D8.2 PA2.2 S1.1 S1.2 S2.1 S3.1
  other v1: 2009.65,276.93
  other v2: 3289.29,264.51 3285.24,1024.53 3285.24,1556.02
HILO: HILO.2 U1.29 | length 879.6
  Top Layer w8: U1.29@857.32,1145.46 857.32,1107.25 983.74,980.84 983.74,943.46 1070.87,856.34 1070.87,795.28 1118.11,748.03 1118.11,622.05 1074.8,578.74 976.38,578.74 946.46,548.82 946.46,506.3 HILO.2@948.82,503.94 ; HILO.2@946.26,501.06 HILO.2@946.46,500.87
INH1: C23.2 C27.2 CF1.2 U1.62 | length 2010.4
  Top Layer w10: U1.62@660.47,1491.46 660.47,1531.73 558.74,1633.46 558.74,1653.46 138.74,1653.46 90,1604.72 90,470 52.01,432.01 51.48,432.01 41.26,421.78 41.26,421.26 C27.2@31.5,421.26 ; C27.2@31.5,421.26 C23.2 C27.2@31.5,421.26
INH2: C24.2 C28.2 CF2.2 U1.1 | length 1804.9
  Top Layer w10: C24.2 190.95,421.26 180.2,432.01 180.2,433.98 120,494.17 120,1580.63 149.61,1610.24 431.97,1610.24 448.74,1593.46 CF2.2@448.74,1568.46 ; C24.2@196.85,417.32 248.2,417.32 C28.2 ; CF2.2@448.74,1563.46 483.74,1563.46 578.74,1468.46 U1.1@593.74,1468.46
INH3: C25.2 C29.2 CF3.2 U1.16 | length 944.9
  Top Layer w10: CF3.2@443.74,1068.46 488.74,1068.46 588.74,1168.46 U1.16@593.74,1168.46 ; CF3.2 446.3,1066.5 457.05,1055.75 458.71,1055.75 464.57,1049.89 464.57,429.13 C29.2 448.74,421.26 433.07,421.26 ; C25.2@405.51,421.26 433.07,421.26 ; C25.2@405.51,421.26 C25.2 C25.2@405.51,421.26 ; C25.2@405.51,421.26 410.35,421.26 433.07,421.26
INH4: C26.2 C30.2 CF4.2 U1.19 | length 893.1
  Top Layer w9: 661.87,1116.59 U1.19@661.87,1135.34
  Top Layer w10: CF4.2@533.74,963.46 543.74,973.46 543.74,998.46 661.87,1116.59 ; CF4.2@535.43,960.63 503.94,960.63 496.06,952.76 496.06,502.87 564.96,433.98 564.96,432.01 575.71,421.26 C26.2 C30.2
LED1: D5.1 R41.1 | length 68
  Top Layer w10: v1(2177.17,2007.87) D5.1
  Bottom Layer w10: v1(2177.17,2007.87) 2177.65,2007.87 2190.52,2020.75 2195.94,2020.75 R41.1
LED2: D6.1 R42.1 | length 70
  Top Layer w10: v1(2070.87,2007.87) D6.1
  Bottom Layer w10: v1@2080.71,2007.87 2102.36,2029.53 R42.1
LED3: D7.1 R43.1 | length 79.2
  Top Layer w10: v1(1972.44,2003.94) 2003.94,2003.94 D7.1
  Bottom Layer w10: v1(1972.44,2003.94) 1973.99,2003.94 1985.8,2015.75 1986.22,2015.75 2000,2029.53 R43.1
LED4: D8.1 R44.1 | length 75.9
  Top Layer w10: v1@1874.02,2007.87 D8.1
  Bottom Layer w10: v1(1870.08,2007.87) 1874.14,2007.87 1882.01,2015.75 1887.8,2015.75 1901.57,2029.53 R44.1
LON1: C15.1 P2.1 RF1.2 U1.59 | length 585.5
  Top Layer w10: P2.1@582.68,1952.76 582.68,1909.45 668.27,1823.86 RF1.2 673.74,1723.46 C15.1@718.74,1678.46 ; 701.18,1698.46 721.18,1678.46 C15.1@718.74,1678.46 ; U1.59@719.53,1491.46 719.53,1562.68 688.74,1593.46 688.74,1663.46 703.74,1678.46 C15.1@718.74,1678.46
LON2: C17.1 P4.1 RF2.2 U1.4 | length 627.6
  Top Layer w8: 408.74,1468.46 468.74,1468.46 530.16,1407.05 U1.4@595.74,1407.05
  Top Layer w10: v2(248.74,1503.46) 303.74,1448.46 C17.1@378.74,1448.46 ; C17.1@388.74,1431.02 C17.1 388.74,1448.46 408.74,1468.46
  Bottom Layer w10: v2@248.03,1503.94 249.21,1503.94 271.88,1526.6 P4.1
LON3: C19.1 P6.1 RF3.2 U1.13 | length 908.3
  Top Layer w8: 468.74,1168.46 530.16,1229.88
  Top Layer w9: 403.74,1168.46 468.74,1168.46
  Top Layer w10: RF3.2 319.21,1198.46 C19.1@376.3,1198.46 ; v2(248.74,1128.46) 218.46,1128.46 200,1110 200,900 270,830 P6.1 ; C19.1@378.74,1198.46 C19.1@376.3,1198.46 ; 403.74,1168.46 378.74,1193.46 C19.1 C19.1@376.3,1198.46 ; 530.16,1229.88 U1.13@595.74,1229.88
LON4: C21.1 P8.1 RF4.2 U1.22 | length 491.7
  Top Layer w10: P8.1@598.43,740.16 598.43,798.15 668.74,868.46 RF4.2@668.74,903.46 ; RF4.2@663.74,903.46 708.74,948.46 C21.1 688.74,980.91 688.74,1048.46 719.53,1079.25 U1.22@719.53,1145.46
LOP1: C16.1 P3.1 U1.58 | length 487.4
  Top Layer w10: C16.1 721.18,1596.02 739.21,1577.99 U1.58@739.21,1491.46
  Bottom Layer w10: P3.1@688.98,1952.76 693.74,1952.76 718.19,1928.31 718.19,1923.54 721.24,1920.49 v2(721.24,1615.96)
LOP2: C18.1 P5.1 U1.5 | length 471.1
  Top Layer w10: C18.1@443.74,1431.02 468.74,1431.02 512.4,1387.36 U1.5@595.74,1387.36
  Bottom Layer w10: P5.1 446.24,1643.76 446.24,1438.37 v2@444.88,1437.01
  other v2: 446.24,1435.96
LOP3: C20.1 P7.1 U1.12 | length 459.5
  Top Layer w10: C20.1 466.18,1200.91 514.84,1249.57 U1.12@595.74,1249.57
  Bottom Layer w10: P7.1@389.76,937.01 389.76,1144.49 v2(446.24,1200.96)
LOP4: C22.1 P9.1 U1.23 | length 428.3
  Top Layer w10: v2(721.18,1013.46) 721.18,1045.91 739.21,1063.94 U1.23@739.21,1153.46
  Bottom Layer w10: P9.1@712.6,736.22 721.18,744.8 v2(721.18,1013.46)
LVIN-1: L5.1 LV-IN.1 U5.3 | length 335.4
  Top Layer w10: L5.1@51.18,196.85 51.18,194.28 141.73,103.73 141.73,22.05 LV-IN.1
  other v1: 45.08,174.57
LVIN-2: L6.1 LV-IN.3 U4.3 | length 296.9
  Top Layer w10: L6.1 242.13,196.85 252.87,186.1 252.87,184.13 275.59,161.42 275.59,-11.81 LV-IN.3@326.77,-62.99
  other v1: 241.93,178.5
LVIN-3: L7.1 LV-IN.5 U3.3 | length 305.7
  Top Layer w10: LV-IN.5@425.2,-66.93 425.2,-61.42 377.95,-14.17 377.95,145.67 416.42,184.13 416.42,186.1 427.17,196.85 L7.1
  other v1: 425,178.5
LVIN-4: L8.1 LV-IN.7 U2.3 | length 307.9
  Top Layer w10: LV-IN.7@531.5,-70.87 545.71,-56.65 573.27,-56.65 589.49,-40.43 L8.1
  other v1: 588.39,162.76
MODE: SLOPE.2 U1.41 | length 1189.5
  Top Layer w10: U1.41@941.74,1328.31 998.9,1328.31 v1@1008.74,1318.46
  Bottom Layer w10: v1@1008.74,1318.46 1307.09,1318.46 1452.76,1464.13 1452.76,1968.5 1472.44,1988.19 1490.21,1988.19 1505.95,2003.94 1505.95,2037.35 SLOPE.2@1500,2043.31
  other v1: 1007.87,1318.9
NetC3_2: C3.2 C14.1 L10.2 U1.36 | length 280.1
  Top Layer w10: U1.36@941.74,1229.88 C14.1@1221.85,1229.88
NetC4_2: C4.2 C13.1 L9.2 U1.45 | length 294.9
  Top Layer w10: U1.45@941.74,1407.05 1226.85,1407.05 C13.1
NetC5_2: C5.2 L1.2 U1.26 | length 272.1
  Top Layer w10: U1.26@798.27,1145.46 798.27,1083.94 828.74,1053.46 L1.2 C5.2
NetC6_2: C6.2 L2.2 U1.9 | length 415.7
  Top Layer w10: L2.2 C6.2 318.74,1293.46 333.9,1308.62 U1.9@595.74,1308.62
NetC7_2: C7.2 U1.61 | length 135.4
  Top Layer w10: C7.2@653.74,1615.91 653.74,1573.46 680.16,1547.05 U1.61@680.16,1491.46
NetC8_2: C8.2 L3.2 U1.8 | length 417.8
  Top Layer w10: L3.2 C8.2 313.74,1348.46 333.9,1328.31 U1.8@595.74,1328.31
NetC9_2: C9.2 U1.2 | length 175.1
  Top Layer w8: 507.99,1508.46 570.04,1446.42
  Top Layer w9: C9.2 507.99,1508.46
  Top Layer w10: 570.04,1446.42 U1.2@595.74,1446.42
NetC10_2: C10.2 L4.2 U1.55 | length 267.1
  Top Layer w9: U1.55@798.27,1491.46 798.27,1557.99 828.74,1588.46 C10.2@828.74,1695.91
  Top Layer w10: C10.2 L4.2
NetC11_2: C11.2 U1.15 | length 177.2
  Top Layer w10: C11.2 503.74,1123.46 570.79,1190.51 U1.15@595.74,1190.51
NetC12_2: C12.2 U1.20 | length 140.4
  Top Layer w10: C12.2@653.74,1016.02 653.74,1068.46 680.16,1094.88 U1.20@680.16,1145.46
NetC27_1: C27.1 L5.2 | length 106.5
  Top Layer w10: C27.1 38.77,260.44 L5.2@39.37,259.84
NetC28_1: C28.1 L6.2 | length 119.9
  Top Layer w10: L6.2 240.16,355.39 250.91,366.14 C28.1
NetC29_1: C29.1 L7.2 | length 126.7
  Top Layer w10: L7.2 431.1,251.97 456.69,277.56 C29.1
NetC30_1: C30.1 L8.2 | length 131.7
  Top Layer w10: L8.2@594.49,251.97 594.49,255 636.73,297.24 C30.1
NetC31_2: C31.2 R4.2 | length 57.9
  Top Layer w10: C31.2 R4.2
NetC32_2: C32.2 R7.2 | length 57.9
  Top Layer w10: C32.2 R7.2
NetC33_2: C33.2 R9.2 | length 57.9
  Top Layer w10: C33.2 R9.2
NetC34_2: C34.2 R12.2 | length 57.9
  Top Layer w10: C34.2 R12.2
NetC35_2: C35.2 R14.2 | length 57.9
  Top Layer w10: C35.2 R14.2
NetC36_2: C36.2 R17.2 | length 57.9
  Top Layer w10: C36.2 R17.2
NetC37_2: C37.2 R19.2 | length 57.4
  Top Layer w10: C37.2 R19.2
NetC38_2: C38.2 R22.2 | length 57.9
  Top Layer w10: C38.2 R22.2
NetC44_1: C44.1 D1.2 R24.1 R25.1 | length 225.7
  Top Layer w10: R25.1@2460.63,1665.35 2462.6,1667.32 2462.6,1718.5 2462.6,1775.59 2466.54,1779.53 2572.83,1779.53 R24.1@2574.8,1777.56
NetC46_1: C46.1 D2.2 R28.1 R29.1 | length 232.4
  Top Layer w10: C46.1 2466.54,1362.2 2466.54,1312.99 R29.1@2468.5,1311.02 ; C46.1@2468.5,1358.27 D2.2 2474.41,1425.2 R28.1@2570.87,1425.2
NetC48_1: C48.1 D3.2 R32.1 R33.1 | length 224.9
  Top Layer w10: R33.1@2468.5,960.63 R33.1 2470.47,1090.55 D3.2 2561.02,1092.52 R32.1@2562.99,1094.49
NetC50_1: C50.1 D4.2 R36.1 R37.1 | length 224.9
  Top Layer w10: R37.1@2468.5,582.68 2470.47,584.65 R37.1 2470.47,712.6 D4.2 2561.02,714.57 R36.1@2562.99,716.54
NetCc1_2: Cc1.2 D1.1 R23.2 R26.2 | length 207.6
  Top Layer w10: Cc1.2 2265.75,1688.98 2282.4,1705.63 2288.31,1705.63 2297.99,1715.31 2321.61,1715.31 R26.2@2330.71,1724.41 ; R26.2 R23.2 D1.1@2397.64,1775.59
NetCc2_2: Cc2.2 D2.1 R27.2 R30.2 | length 209.2
  Top Layer w10: Cc2.2 2265.75,1334.65 2282.4,1351.3 2288.31,1351.3 2301.93,1364.92 2329.49,1364.92 R30.2@2334.65,1370.08 ; R30.2@2338.58,1366.14 R30.2@2334.65,1370.08 ; D2.1@2397.64,1425.2 2397.64,1424.13 2390.83,1417.32 R27.2 R30.2@2334.65,1370.08
NetCc3_2: Cc3.2 D3.1 R31.2 R34.2 | length 216.4
  Top Layer w10: Cc3.2 2269.69,984.25 2286.34,1000.91 2315.87,1000.91 R34.2@2334.65,1019.68 ; R34.2 R31.2 2397.64,1074.8 D3.1@2409.45,1086.61
NetCc4_2: Cc4.2 D4.1 R35.2 R38.2 | length 212.6
  Top Layer w10: Cc4.2 2309.06,620.08 2334.65,645.67 R38.2 2338.58,696.85 R35.2@2342.52,700.79 ; R35.2 R35.2@2342.52,700.79 ; D4.1@2405.51,716.54 2405.51,711.54 2394.76,700.79 R35.2@2342.52,700.79
NetCF1_1: CF1.1 RF1.1 | length 50.5
  Top Layer w10: CF1.1@558.74,1723.46 RF1.1
NetCF2_1: CF2.1 RF2.1 | length 140.2
  Top Layer w10: RF2.1 388.27,1562.99 CF2.1@388.74,1563.46
NetCF3_1: CF3.1 RF3.1 | length 144.5
  Top Layer w10: RF3.1@248.74,1073.46 253.74,1068.46 CF3.1
NetCF4_1: CF4.1 RF4.1 | length 62.5
  Top Layer w10: CF4.1@543.74,898.46 548.74,903.46 RF4.1
NetPA2_4: PA2.4 W1.2 | length 134.5
  Top Layer w10: PA2.4@1604.92,276.97 PA2.4@1606.3,275.59 ; W1.2@1604.92,409.25 W1.2
  Top Layer w30: PA2.4@1604.92,276.97 W1.2@1604.92,409.25
NetPA3_1: PA3.1 R45.2 | length 89.3
  Bottom Layer w10: PA3.1 2606.3,2173.43 R45.2@2606.3,2086.61
NetPA3_2: PA3.2 R46.2 | length 86
  Bottom Layer w10: PA3.2 2504.53,2093.9 R46.2@2507.87,2090.55
NetPA3_3: PA3.3 R39.2 | length 90.2
  Bottom Layer w10: PA3.3@2401.57,2177.17 2404.53,2174.21 2404.53,2089.57 R39.2
NetPA3_4: PA3.4 R40.2 | length 86.8
  Bottom Layer w10: R40.2 2304.53,2091.14 2304.53,2170.67 PA3.4@2307.09,2173.23
NetPA3_5: PA3.5 R41.2 | length 84.7
  Bottom Layer w10: PA3.5 2204.53,2090.75 R41.2@2204.72,2090.55
NetPA3_6: PA3.6 R42.2 | length 82.3
  Bottom Layer w10: PA3.6@2102.36,2169.29 2104.53,2167.13 2104.53,2090.35 R42.2
NetPA3_7: PA3.7 R43.2 | length 86
  Bottom Layer w10: PA3.7 2004.53,2093.9 R43.2@2007.87,2090.55
NetPA3_8: PA3.8 R44.2 | length 85.5
  Bottom Layer w10: R44.2 1904.53,2089.57 1904.53,2172.24 PA3.8@1905.51,2173.23
NetR4_1: R4.1 T1.4 | length 307.3
  Top Layer w10: R4.1@1657.48,1641.73 1724.41,1708.66 1724.41,1759.65 1803.39,1838.62 T1.4@1853.39,1838.62
NetR7_1: R7.1 T1.6 | length 233.2
  Top Layer w10: R7.1 1666.14,1583.46 ; 1665.35,1582.68 1666.14,1583.46 ; T1.6 1731.3,1648.62 1666.14,1583.46
NetR9_1: R9.1 T2.4 | length 248
  Top Layer w10: R9.1@1649.61,1381.89 1692.91,1381.89 1772.15,1461.12 1825.89,1461.12 T2.4
NetR12_1: R12.1 T2.6 | length 663.6
  Top Layer w10: R12.1@1649.61,1433.07 1649.61,1438.07 1657.87,1446.34 1662.87,1446.34 1770.16,1553.62 1923.39,1553.62 1943.39,1533.62 1943.39,1333.62 1898.39,1288.62 T2.6
NetR14_1: R14.1 T3.4 | length 283.9
  Top Layer w10: R14.1@1649.61,1232.28 1767.72,1232.28 1796.38,1203.62 1833.39,1203.62 1853.39,1183.62 T3.4
NetR17_1: R17.1 T3.6 | length 377.6
  Top Layer w10: R17.1@1649.61,1173.23 1688.98,1173.23 1736.22,1125.98 1736.22,1005.79 1793.39,948.62 1828.39,948.62 T3.6
NetR19_1: R19.1 T4.4 | length 337.9
  Top Layer w10: R19.1@1649.61,968.5 1657.05,961.06 1657.05,921.69 1794.24,784.5 1837.51,784.5 T4.4 T4.4@1833.39,788.62
NetR22_1: R22.1 T4.6 | length 726.7
  Top Layer w10: R22.1@1649.61,1024.13 1657.52,1016.22 1680.63,1016.22 1704.72,992.13 1704.72,948.82 1803.15,850.39 1906.61,850.39 1943.39,813.62 1943.39,593.62 1918.39,568.62 T4.6
O1H: C31.1 R3.1 | length 57.9
  Top Layer w10: R3.1 C31.1
O1L: C32.1 R6.1 | length 57.9
  Top Layer w10: R6.1 C32.1
O2H: C33.1 R8.1 | length 57.9
  Top Layer w10: R8.1 C33.1
O2L: C34.1 R11.1 | length 57.9
  Top Layer w10: R11.1 C34.1
O3H: C35.1 R13.1 | length 57.9
  Top Layer w10: R13.1 C35.1
O3L: C36.1 R16.1 | length 57.9
  Top Layer w10: R16.1 C36.1
O4H: C37.1 R18.1 | length 57.9
  Top Layer w10: R18.1 C37.1
O4L: C38.1 R21.1 | length 57.9
  Top Layer w10: R21.1 C38.1
T6: R45.1 S1.3 | length 392.5
  Bottom Layer w10: R45.1 2667.32,2029.53 2805.91,2168.11 2939.76,2168.11 S1.3@2940.94,2169.29
T7: R46.1 S1.4 | length 482.4
  Bottom Layer w10: R46.1 2511.81,2029.53 2547.96,1993.38 2713.85,1993.38 2783.46,2062.99 2940.94,2062.99 S1.4@2944.88,2066.93
T10: R39.1 S2.2 | length 687.1
  Bottom Layer w10: R39.1 2409.45,2029.53 2462.6,1976.38 2826.77,1976.38 2919.09,1884.06 2919.09,1773.82 v1@2921.26,1771.65
  other v1: 2919.09,1772.99
T11: R40.1 S3.2 | length 1048.8
  Bottom Layer w10: R40.1 2311.02,2029.53 2383.86,1956.69 2795.28,1956.69 2885.83,1866.14 2885.83,1510.98 2916.5,1480.31 v1@2917.32,1480.31 ; v1@2919.09,1482.48 v1@2921.26,1480.32
  other v1: 2919.09,1477.72
VCM1: C39.1 P11.1 U1.50 | length 512.5
  Top Layer w10: U1.50@896.69,1491.46 896.69,1531.42 1003.74,1638.46 v2(1026.18,1638.46)
  Bottom Layer w10: v2(1026.18,1638.46) 1118.74,1731.02 1118.74,1823.46 1143.74,1848.46 P11.1@1183.74,1848.46
VCM2: C40.1 P12.1 U1.49 | length 392.4
  Top Layer w10: U1.49@916.38,1491.46 916.38,1516.1 978.74,1578.46 C40.1
  Bottom Layer w10: v2(1023.74,1578.46) 1023.74,1583.46 1173.74,1733.46 P12.1@1188.74,1733.46
VCM3: C41.1 P13.1 U1.31 | length 525.9
  Top Layer w8: 896.69,1120.51 973.74,1043.46
  Top Layer w9: 896.69,1120.51 U1.31@896.69,1145.46 ; 973.74,1043.46 1021.18,1043.46 C41.1
  Bottom Layer w10: v1@1026.18,1038.46 1026.18,1045.91 1053.74,1073.46 1113.74,1073.46 1188.74,998.46 P13.1@1188.74,873.46
  other v1: 1025.39,1036.77
VCM4: C42.1 P14.1 U1.30 | length 532.7
  Top Layer w8: 877.01,1110.2 U1.30@877.01,1145.46
  Top Layer w9: 877.01,1110.2 964.74,1022.46 C42.1@1013.74,973.46
  Top Layer w10: C42.1@1013.74,973.46 C42.1
  Bottom Layer w10: v1@1026.18,973.46 1026.18,956.02 1108.74,873.46 1108.74,793.46 1138.74,763.46 P14.1@1173.74,763.46
  other v1: 1025.39,973.78
VIN: C52.1 PA2.1 U6.1 | length 387.4
  Top Layer w10: C52.1@1758.46,440.94 C52.1@1763.78,440.94 ; C52.1@1765.75,433.07 C52.1@1778.46,420.35 ; PA2.1@1880.2,304.84 1880.2,300.12 PA2.1
  Top Layer w24: U6.1@1640.35,559.06 C52.1@1758.46,440.94 ; C52.1@1778.46,420.35 1778.46,406.57 PA2.1@1880.2,304.84
VIN1: C15.2 U1.56 | length 202.8
  Top Layer w9: U1.56@778.58,1491.46 778.58,1563.31 808.74,1593.46 808.74,1653.46 C15.2@788.74,1673.46
VIN2: C17.2 U1.7 | length 220.8
  Top Layer w8: 409.21,1347.99 U1.7@595.74,1347.99
  Top Layer w10: C17.2@393.74,1375.91 393.74,1363.46 409.21,1347.99
VIN3: C19.2 U1.10 | length 230.6
  Top Layer w10: C19.2 411.65,1288.94 U1.10@595.74,1288.94
VIN4: C21.2 U1.25 | length 222.9
  Top Layer w10: C21.2 808.74,980.91 808.74,1043.46 778.58,1073.62 U1.25@778.58,1145.46
VIP1: C16.2 U1.57 | length 134.2
  Top Layer w10: U1.57@758.9,1491.46 758.9,1578.62 776.3,1596.02 C16.2
VIP2: C18.2 U1.6 | length 140.4
  Top Layer w10: C18.2@458.74,1375.91 466.97,1367.68 U1.6@595.74,1367.68
VIP3: C20.2 U1.11 | length 157.5
  Top Layer w10: C20.2 456.3,1256.02 469.53,1269.25 U1.11@595.74,1269.25
VIP4: C22.2 U1.24 | length 147.2
  Top Layer w10: U1.24@758.9,1153.46 758.9,1063.31 776.3,1045.91 C22.2
VO1: Cc1.1 R5.1 T1.1@2053.39,1648.62 | length 247.9
  Top Layer w10: T1.1@2053.39,1648.62 2178.15,1648.62 2212.6,1683.07 Cc1.1@2212.6,1685.04 ; R5.1 2204.72,1685.04 Cc1.1@2208.66,1681.1
VO2: Cc2.1 R10.1 T2.1@2053.39,1288.62 | length 243.1
  Top Layer w10: T2.1@2053.39,1288.62 2172.48,1288.62 2204.72,1320.87 Cc2.1@2204.72,1326.77 ; R10.1 2208.66,1397.64 Cc2.1@2208.66,1330.71
VO3: Cc3.1 R15.1 T3.1@2053.39,923.62 | length 247.9
  Top Layer w10: T3.1@2053.39,923.62 2161.81,923.62 2204.72,966.54 Cc3.1@2204.72,978.35 ; Cc3.1@2208.66,984.25 R15.1
VO4: Cc4.1 R20.1 T4.1@2053.39,568.62 | length 261.2
  Top Layer w10: T4.1@2053.39,568.62 2165.08,568.62 2212.6,616.14 2212.6,692.91 R20.1
VOH1: R3.2 U1.47 | length 499.1
  Top Layer w10: U1.47@941.74,1446.42 1006.69,1446.42 1118.74,1558.46 1238.74,1558.46 1323.74,1643.46 R3.2
VOH2: R8.2 U1.43 | length 442.9
  Top Layer w10: U1.43@941.74,1367.68 1049.53,1367.68 1073.74,1343.46 1308.03,1343.46 1337.12,1372.55 1353.97,1372.55 R8.2
VOH3: R13.2 U1.38 | length 451.6
  Top Layer w10: U1.38@941.74,1269.25 1054.53,1269.25 1073.74,1288.46 1290.28,1288.46 R13.2@1349.96,1228.78 ; R13.2@1350.39,1228.35 R13.2@1349.96,1228.78 ; R13.2 R13.2@1349.96,1228.78
VOH4: R18.2 U1.34 | length 509.7
  Top Layer w10: U1.34@941.74,1190.51 986.65,1190.51 1094.49,1082.68 1212.6,1082.68 1326.34,968.94 R18.2
VOL1: R6.2 U1.46 | length 482.4
  Top Layer w10: U1.46@941.74,1426.73 1014.85,1426.73 1111.58,1523.46 1268.74,1523.46 1328.74,1583.46 R6.2
VOL2: R11.2 U1.44 | length 455.1
  Top Layer w10: U1.44@941.74,1387.36 1069.84,1387.36 1086.8,1370.41 1089.72,1367.48 1284.8,1367.48 1340.12,1422.8 1351.26,1422.8 1360.04,1431.58 R11.2
VOL3: R16.2 U1.37 | length 456.4
  Top Layer w10: U1.37@941.74,1249.57 1074.84,1249.57 1088.74,1263.46 1271.97,1263.46 1348.94,1186.5 1352.87,1186.5 R16.2@1358.27,1181.1
VOL4: R21.2 U1.35 | length 491.6
  Top Layer w10: U1.35@941.74,1210.2 998.46,1210.2 1102.36,1106.3 1248.03,1106.3 1326.77,1027.56 ; 1328.74,1028.94 R21.2
pads on no net: GAIN12.1 GAIN34.1 LV-IN.2 LV-IN.4 LV-IN.6 LV-IN.8 PA1.5 PA1.6 PA2.5 PA2.6 PA2.7 PA2.8 PA4.1 PA4.2 PA4.3 PA4.4 PA4.5 PA4.6 PA4.7 PA4.8 PA4.9 PA4.10 S2.3 S2.4 S3.3 S3.4 T1.1@2133.39,1568.62 T1.5 T2.1@2133.39,1208.62 T2.5 T3.1@2133.39,843.62 T3.5 T4.1@2133.39,488.62 T4.5 U1.32 U1.40

## Polygon pours and split planes (outlines as drawn)
AGND on Bottom Layer "AGND_L02_P000" (solid, pour order 0): -78.74,-122.05 -114.17,-86.61 -118.11,-86.61 -118.11,2098.43 -114.17,2102.36 1767.72,2102.36 1952.76,1917.32 2712.6,1917.32 2779.53,1850.39 2779.53,381.89 1118.11,381.89 1118.11,228.35 1094.49,204.72 732.28,204.72 673.23,145.67 673.23,-35.43 586.61,-122.05 -62.99,-122.05
GND on Bottom Layer "GND_L02_P001" (solid, pour order 1): 1811.02,2106.3 1964.57,1952.76 2712.6,1952.76 2799.21,1866.14 2799.21,354.33 2797.49,356.05 1759.19,356.05 1759.19,213.25 1771.65,200.79 3326.77,200.79 3326.77,2224.41 1811.02,2224.41
AGND on Top Layer "AGND_L01_P003" (solid, pour order 3): -78.74,-122.05 -114.17,-86.61 -118.11,-86.61 -118.11,2098.43 -106.3,2110.24 1759.84,2110.24 1952.76,1917.32 2712.6,1917.32 2818.9,1811.02 2818.9,374.02 1744.09,374.02 1744.09,204.72 732.28,204.72 673.23,145.67 673.23,-35.43 586.61,-122.05 -62.99,-122.05
GND on Top Layer "GND_L01_P002" (solid, pour order 2): 1814.96,2106.3 1968.5,1952.76 2716.54,1952.76 2854.33,1814.96 2854.33,356.05 2801.43,356.05 1763.13,356.05 1763.13,213.25 1775.59,200.79 3326.77,200.79 3326.77,2224.41 1814.96,2224.41

## Keep-outs
Keep-Out Layer:
  lines w10: -125.98,2000 -125.98,2236.22 -122.05,2240.16 3336.61,2240.16 3336.61,200.79 732.28,200.79 679.13,147.64 679.13,-39.37 589.57,-128.94 -83.66,-128.94 ; -125.98,2000.12 -125.98,-86.61 -82.68,-129.92

## Silkscreen, mask and mechanical layers (free items; w line width, h text height)
Top Overlay:
  lines w10: 3334.65,2240.16 -114.17,2240.16 -122.05,2232.28 -122.05,-86.61 -78.74,-129.92 586.61,-129.92 677.17,-39.37 677.17,145.67 732.28,200.79 3335.87,200.79 3335.87,2240.16
  text "+" at 1338.74,1958.46 h40 r180
  text "AFE1" at 19.68,1712.6 h60 r90
  text "AD8334" at 118.11,1643.7 h60 r90
  text "-" at 1050.08,401.97 h40
  text "+" at 835.08,396.97 h40

## Text inside footprints (layer, text, board x,y; h text height)
LV-IN: Top Overlay "2" at 114.17,22.64 h50; Top Overlay "1" at 129.92,-91.54 h50; Top Overlay "7" at 602.36,-91.54 h50; Top Overlay "8" at 602.36,16.73 h50
U1: Top Overlay "*" at 554.7,1490.62 h50; Mechanical 1 "*" at 554.7,1490.62 h50